# EAGLE board print (EAGLE 5.12), part 1 of 2
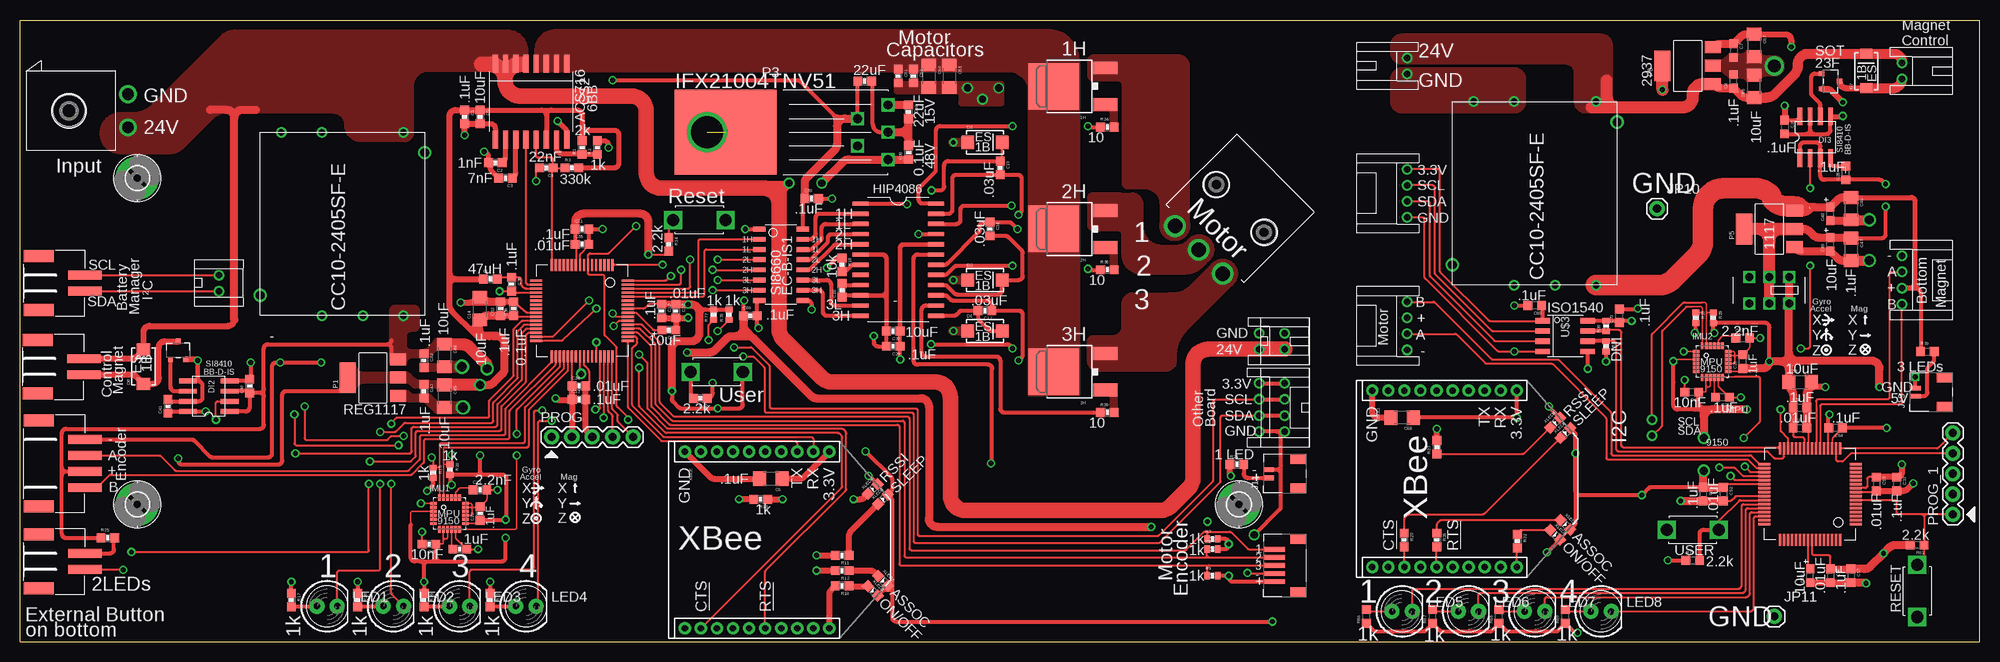
[diagram p0: board, top side]
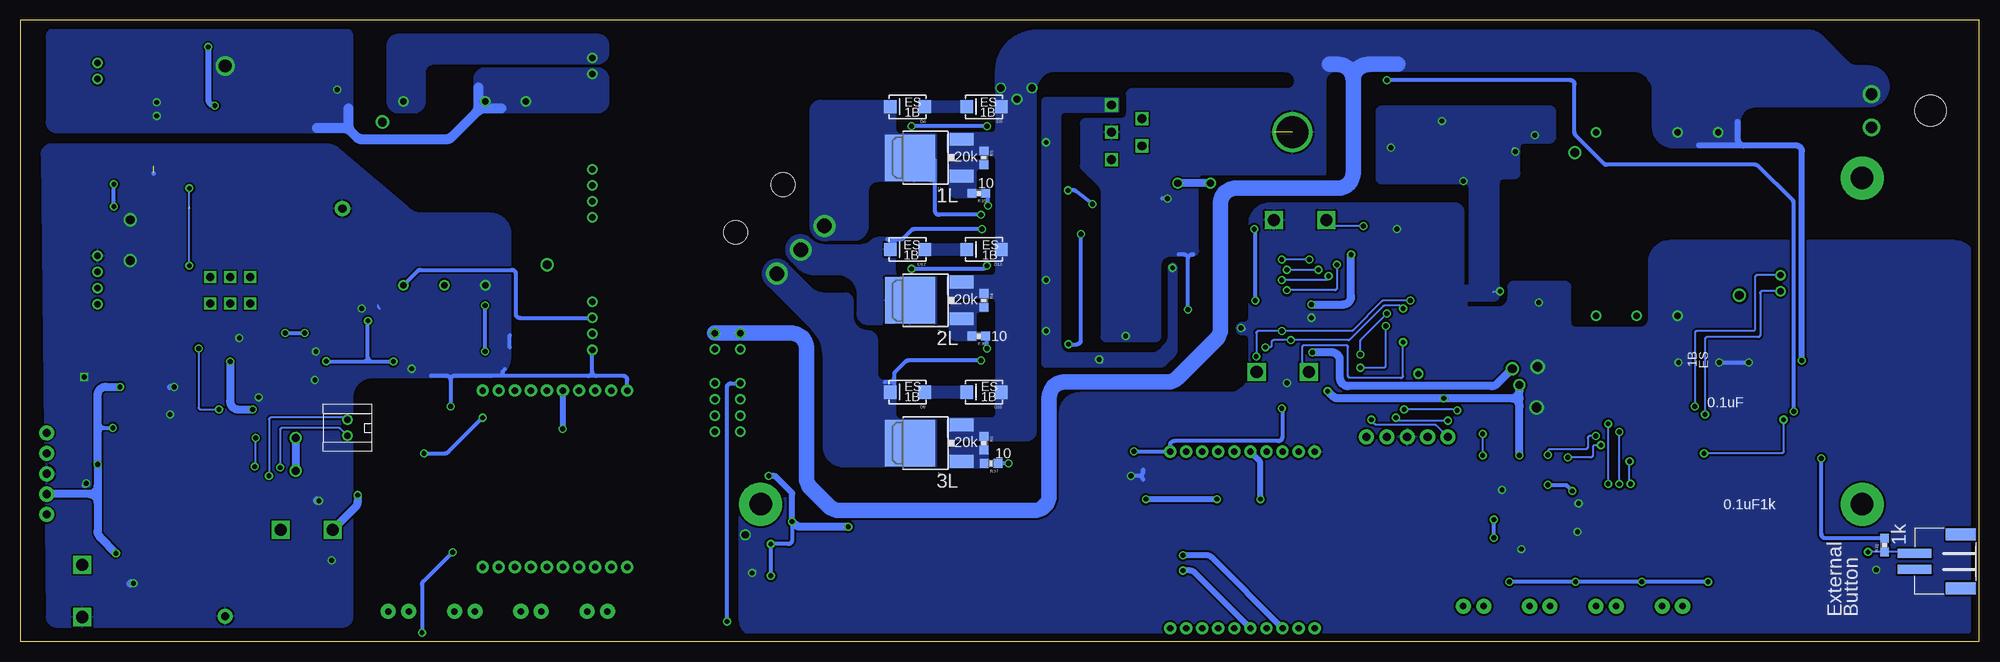
[diagram p1: board, bottom side, seen from below]

Size 243.97 x 77.47 mm. Coordinates in mm from the lower left corner, seen from the top.
Outline: 0,0 243.97,0 243.97,77.47 0,77.47 0,0
Copper layers (1*16): Top 0.035mm / dielectric 1.5mm / Bottom 0.035mm
Design rules "default": minimum track width 10mil, minimum drill 24mil, track to track 8mil, track to pad 8mil, pad to pad 8mil, via to via 8mil, smd to smd 8mil, copper to edge 40mil, drill to drill 8mil, minimum pad ring 10mil, minimum via ring 8mil, stop-mask expansion 4mil, vias tented up to drill 0mil, thermal gap 10mil

## Footprints (pad centres in the part's own frame; a part is rotated, then mirrored left to right if it is on the bottom)
DPAK = smd 5.791 x 6.274: D 0,1.587 | smd 1.6 x 3: G -2.286,-4.851; S 2.286,-4.851
JST-2-PH-SMD = smd 1.1 x 4.2: 1 -1,-7.7; 2 1,-7.7 | smd 1.5 x 3.7: P$1 -3.35,-1.95; P$4 3.35,-1.95
0603 = smd 1.1 x 1.1: 1 -0.85,0; 2 0.85,0
1206 = smd 1.6 x 1.8: 1 -1.4,0; 2 1.4,0
0603-POL = smd 1.1 x 1: + 0.85,0; - -0.85,0
SOIC16-W = smd 0.65 x 2.25: 1 -4.445,-4.75; 2 -3.175,-4.75; 3 -1.905,-4.75; 4 -0.635,-4.75; 5 0.635,-4.75; 6 1.905,-4.75; 7 3.175,-4.75; 8 4.445,-4.75; 9 4.445,4.75; 10 3.175,4.75; 11 1.905,4.75; 12 0.635,4.75; 13 -0.635,4.75; 14 -1.905,4.75; 15 -3.175,4.75; 16 -4.445,4.75
SMA-DIODE = smd 1.52 x 1.63: A -2.15,0; C 2.15,0
SMA-DIODE@1 = smd 1.27 x 1.47: A -2.15,0; C 2.15,0
SOIC16-N = smd 0.6 x 1.55: 1 -4.445,-2.7; 2 -3.175,-2.7; 3 -1.905,-2.7; 4 -0.635,-2.7; 5 0.635,-2.7; 6 1.905,-2.7; 7 3.175,-2.7; 8 4.445,-2.7; 9 4.445,2.7; 10 3.175,2.7; 11 1.905,2.7; 12 0.635,2.7; 13 -0.635,2.7; 14 -1.905,2.7; 15 -3.175,2.7; 16 -4.445,2.7
SOIC8-N = smd 2.2 x 0.6: 1 -2.6,1.905; 2 -2.6,0.635; 3 -2.6,-0.635; 4 -2.6,-1.905; 5 2.6,-1.905; 6 2.6,-0.635; 7 2.6,0.635; 8 2.6,1.905
2,8-PAD = drill 2.8 pad 5.334 round: B2,8 0,0
LGA24_4X4 = smd 0.8 x 0.35: 1 -2,1.25; 2 -2,0.75; 3 -2,0.25; 4 -2,-0.25; 5 -2,-0.75; 6 -2,-1.25; 13 2,-1.25; 14 2,-0.75; 15 2,-0.25; 16 2,0.25; 17 2,0.75; 18 2,1.25 | smd 0.35 x 0.85: 7 -1.25,-1.975; 8 -0.75,-1.975; 9 -0.25,-1.975; 10 0.25,-1.975; 11 0.75,-1.975; 12 1.25,-1.975; 19 1.25,1.975; 20 0.75,1.975; 21 0.25,1.975; 22 -0.25,1.975; 23 -0.75,1.975; 24 -1.25,1.975
JST-2-PH-V = drill 0.8 round: 1 -1,0; 2 1,0
JST-4-PH-SMD = smd 1.1 x 4.2: 1 -3,-7.7; 2 -1,-7.7; 3 1,-7.7; 4 3,-7.7 | smd 1.5 x 3.7: P$1 -5.35,-1.95; P$2 5.35,-1.95
JST-5-SH = smd 0.6 x 2.7: 1 2,4; 2 1,4; 3 0,4; 4 -1,4; 5 -2,4 | smd 1.2 x 2: P$6 -3.3,1; P$7 3.3,1
JST-2-PH-TH = drill 0.8 round: 1 -1,-6.35; 2 1,-6.35
JST-SH-2 = smd 0.6 x 1.35: 1 0.5,4.675; 2 -0.5,4.675 | smd 1.2 x 2: P$6 -1.8,1; P$7 1.8,1
JST-4-PH-TH = drill 0.8 round: 1 -3,-6.35; 2 -1,-6.35; 3 1,-6.35; 4 3,-6.35
1X01_TEST = drill 0.762 round: 1 0,0
TE-MINIMATENLOK-2 = drill 1.48 round: 1 -2.07,12.67; 2 2.07,12.67 | hole 3.91: 0,5.33
MOLEX-3-MINIFITJR-RA = drill 1.803 round: 1 4.191,13.538; 2 0,13.538; 3 -4.191,13.538 | hole 3: -4.204,6.248; 4.204,6.248
JST-4-PH-V = drill 0.8 round: 1 -3,0; 2 -1,0; 3 1,0; 4 3,0
1X01 = drill 1.016 pad 1.88 round: 1 0,0
LED5MM = drill 0.813 pad 1.88 round: A -1.27,0; K 1.27,0
SOT23F = smd 0.6 x 0.65: D 0,1.125; G -0.95,-1.125; S 0.95,-1.125
SOIC24-W = smd 0.533 x 1.981: 1 -6.985,-4.686; 2 -5.715,-4.686; 3 -4.445,-4.686; 4 -3.175,-4.686; 5 -1.905,-4.686; 6 -0.635,-4.686; 7 0.635,-4.686; 8 1.905,-4.686; 9 3.175,-4.686; 10 4.445,-4.686; 11 5.715,-4.686; 12 6.985,-4.686; 13 6.985,4.686; 14 5.715,4.686; 15 4.445,4.686; 16 3.175,4.686; 17 1.905,4.686; 18 0.635,4.686; 19 -0.635,4.686; 20 -1.905,4.686; 21 -3.175,4.686; 22 -4.445,4.686; 23 -5.715,4.686; 24 -6.985,4.686
SOT223 = smd 1.499 x 2.007: 1 -2.261,-3.15; 2 0.025,-3.15; 3 2.311,-3.15 | smd 3.81 x 2.007: 4 0,3.15
CC6-2405SF-E = drill 0.8 round: 1 -11.43,7.62; 2 -11.43,-2.54; 3 -11.43,-7.62; 5 11.43,-2.54; 6 11.43,2.54; 7 11.43,7.62 | drill 1.1 round: P$9 8.89,-10.25; P$10 -8.89,10.25
TO220-5 = drill 1.1 square: 1 3.81,-3.404; 2 0,-1.702; 3 3.81,0; 4 0,1.702; 5 3.81,3.404 | smd 12.7 x 10.541: PAD -16.434,0 | drill 3.937 round: PAD2 -18.72,0
TQFP64_10X10 = smd 1.5 x 0.3: 1 -5.7,3.75; 2 -5.7,3.25; 3 -5.7,2.75; 4 -5.7,2.25; 5 -5.7,1.75; 6 -5.7,1.25; 7 -5.7,0.75; 8 -5.7,0.25; 9 -5.7,-0.25; 10 -5.7,-0.75; 11 -5.7,-1.25; 12 -5.7,-1.75; 13 -5.7,-2.25; 14 -5.7,-2.75; 15 -5.7,-3.25; 16 -5.7,-3.75; 33 5.7,-3.75; 34 5.7,-3.25; 35 5.7,-2.75; 36 5.7,-2.25; 37 5.7,-1.75; 38 5.7,-1.25; 39 5.7,-0.75; 40 5.7,-0.25; 41 5.7,0.25; 42 5.7,0.75; 43 5.7,1.25; 44 5.7,1.75; 45 5.7,2.25; 46 5.7,2.75; 47 5.7,3.25; 48 5.7,3.75 | smd 0.3 x 1.5: 17 -3.75,-5.7; 18 -3.25,-5.7; 19 -2.75,-5.7; 20 -2.25,-5.7; 21 -1.75,-5.7; 22 -1.25,-5.7; 23 -0.75,-5.7; 24 -0.25,-5.7; 25 0.25,-5.7; 26 0.75,-5.7; 27 1.25,-5.7; 28 1.75,-5.7; 29 2.25,-5.7; 30 2.75,-5.7; 31 3.25,-5.7; 32 3.75,-5.7; 49 3.75,5.7; 50 3.25,5.7; 51 2.75,5.7; 52 2.25,5.7; 53 1.75,5.7; 54 1.25,5.7; 55 0.75,5.7; 56 0.25,5.7; 57 -0.25,5.7; 58 -0.75,5.7; 59 -1.25,5.7; 60 -1.75,5.7; 61 -2.25,5.7; 62 -2.75,5.7; 63 -3.25,5.7; 64 -3.75,5.7
1X05 = drill 1.016 pad 1.88 round: 1 0,0; 2 2.54,0; 3 5.08,0; 4 7.62,0; 5 10.16,0
0402 = smd 0.7 x 0.9: 1 -0.65,0; 2 0.65,0
TACTILE_SWITCH = drill 1.5 square: 1 -3.25,0; 2 3.25,0
SLIDE_SWITCH = drill 1 square: 1 -2.489,1.651; 2 0,1.651; 3 2.489,1.651; 4 2.489,-1.651; 5 0,-1.651; 6 -2.489,-1.651
SOIC8 = smd 0.65 x 1.8: 1 -1.905,-2.8; 2 -0.635,-2.8; 3 0.635,-2.8; 4 1.905,-2.8; 5 1.905,2.8; 6 0.635,2.8; 7 -0.635,2.8; 8 -1.905,2.8
XBEE-SILK = drill 0.8 pad 1.524 round: 1 -11,20; 2 -11,18; 3 -11,16; 4 -11,14; 5 -11,12; 6 -11,10; 7 -11,8; 8 -11,6; 9 -11,4; 10 -11,2; 11 11,2; 12 11,4; 13 11,6; 14 11,8; 15 11,10; 16 11,12; 17 11,14; 18 11,16; 19 11,18; 20 11,20
0603-DIODE = smd 1.1 x 1.1: AN -0.85,0; CAT 0.85,0

## Placement (x,y rotation side)
1H  IRLR024  [DPAK]  130.3,69.22 90 top
1L  IRLR024  [DPAK]  131.57,60.33 90 bottom
2H  IRLR024  [DPAK]  130.3,51.44 90 top
2L  IRLR024  [DPAK]  131.57,42.55 90 bottom
3H  IRLR024  [DPAK]  130.3,33.66 90 top
3L  IRLR024  [DPAK]  131.57,24.77 90 bottom
BUTTON  [JST-2-PH-SMD]  0.38,10.03 270 bottom
C1  .1uF  [0603]  55.37,65.41 270 top
C2  1nF  [0603]  59.18,59.69 180 top
C3  7nF  [0603]  60.45,57.78 180 top
C4  22nF  [0603]  65.53,59.05 180 top
C5  10uF  [0603]  57.28,65.41 270 top
C6  .1uF  [1206]  93.47,20.32 180 top
C7  .1uF 24V  [0603]  213.36,73.66 270 top
C8  .1uF 24V  [0603]  213.36,69.85 90 top
C9  22uF  [0603]  105.16,69.85 0 top
C10  22uF 15V  [0603]  110.62,66.04 270 top
C11  .1uF  [0603]  69.98,51.44 0 top
C12  .1uF  [0603]  79.88,41.22 270 top
C13  .1uF  [0603]  69.6,30.23 0 top
C14  10uF  [1206]  57.28,41.53 90 top
C15  10uF  [0603-POL]  80.77,38.86 180 top
C16  DNI  [0603]  102.36,43.81 90 top
C17  .03uF 15V  [0603]  120.14,41.27 180 top
C18  .03uF 15V  [0603]  120.78,51.44 270 top
C19  .03uF 15V  [0603]  122.05,59.05 270 top
C20  10nF  [0603]  50.93,12.19 180 top
C21  .1uF  [0603]  54.74,11.56 180 top
C22  .1uF  [0603]  57.28,16 90 top
C23  2.2nF  [0603]  57.28,18.92 0 top
C24  10nF  [0603]  208.15,31.11 180 top
C25  .1uF  [0603]  211.96,30.48 180 top
C26  .1uF  [0603]  214.5,34.92 90 top
C27  2.2nF  [0603]  214.5,37.85 0 top
C28  .1uF  [0603]  227.33,58.42 90 top
C29  .1uF  [0603]  108.71,36.83 180 top
C30  10uF  [0603]  108.71,38.73 180 top
C31  .1uF  [0603]  219.71,64.14 270 top
C32  .1uF  [0603]  233.68,19.68 270 top
C33  .1uF  [0603]  59.82,41.53 90 top
C34  .01uF  [0603]  69.6,31.88 0 top
C35  .01uF  [0603]  69.98,49.53 0 top
C36  .01uF  [0603]  61.47,41.53 90 top
C37  .01uF  [0603]  81.66,41.22 270 top
C38  .1uF  [0603]  61.21,44.58 270 top
C39  .1uF 48V  [0603]  110.62,60.96 90 top
C40  .1uF  [0603]  28.57,31.88 90 top
C41  .1uF  [0603]  18.41,29.34 90 top
C42  .1uF  [0603]  50.29,35.05 270 top
C43  .1uF  [0603]  50.29,31.24 270 top
C44  10uF  [1206]  52.83,35.69 270 top
C45  10uF  [1206]  52.83,30.61 270 top
C46  .1uF  [1206]  227.97,53.98 270 top
C47  .1uF  [1206]  227.97,48.9 270 top
C48  10uF  [0603-POL]  225.43,53.34 90 top
C49  10uF  [0603-POL]  225.43,49.53 90 top
C50  .01uF  [0603]  225.43,8.26 270 top
C51  .01uF  [0603]  221.62,26.67 0 top
C52  .01uF  [0603]  212.09,18.41 270 top
C53  .01uF  [0603]  231.14,19.68 270 top
C54  .1uF  [0603]  226.06,26.67 180 top
C55  .1uF  [0603]  209.55,18.41 270 top
C56  .1uF  [0603]  221.62,29.21 0 top
C57  .1uF  [0603]  227.97,8.26 270 top
C58  10uF  [1206]  221.62,32.38 0 top
C59  .1uF  [0603]  98.55,55.24 0 top
C60  .1uF  [0603]  90.93,40.64 0 top
C61  .01uF  [0603]  109.35,70.48 270 top
C62  .1uF  [0603]  111.25,70.48 270 top
C63  10uF  [0603-POL]  222.88,8.26 90 top
C64  1uF  [1206]  113.16,70.48 270 top
C65  10uF  [1206]  115.7,70.48 270 top
C66  10uF 24V  [1206]  215.9,69.22 90 top
C67  10uF 24V  [1206]  215.9,74.3 270 top
C68  .1uF  [1206]  172.09,27.94 180 top
C69  .1uF  [0603]  188.59,41.91 180 top
C70  .1uF  [0603]  199.14,40.64 90 top
CS2  ACS716KLATR-6BB-T  [SOIC16-W]  63.63,67.31 180 top
D1  ES1B  [SMA-DIODE]  120.14,38.73 0 top
D2  ES1B  [SMA-DIODE]  120.14,45.09 0 top
D3  ES1B  [SMA-DIODE]  120.14,62.23 0 top
D4  ES1B  [SMA-DIODE]  133.48,66.67 180 bottom
D5  ES1B  [SMA-DIODE]  123.95,66.67 180 bottom
D7  ES1B  [SMA-DIODE@1]  229.87,71.12 90 top
D8  ES1B  [SMA-DIODE]  15.37,34.29 90 top
D9  ES1B  [SMA-DIODE]  133.48,31.11 180 bottom
D10  ES1B  [SMA-DIODE]  123.95,31.11 180 bottom
D11  ES1B  [SMA-DIODE]  123.95,48.9 180 bottom
D12  ES1B  [SMA-DIODE]  133.48,48.9 180 bottom
DI1  DIGITAL-ISOLATOR-6CH  [SOIC16-N]  94.74,46.99 270 top
DI2  DIGITAL-ISOLATOR-1CHSOIC8-N  [SOIC8-N]  23.5,30.61 180 top
DI3  DIGITAL-ISOLATOR-1CHSOIC8-N  [SOIC8-N]  223.52,62.87 90 top
H1  MOUNT-PAD-ROUND2.8  [2,8-PAD]  14.61,57.78 0 top
H2  MOUNT-PAD-ROUND2.8  [2,8-PAD]  14.61,17.14 0 top
H3  MOUNT-PAD-ROUND2.8  [2,8-PAD]  151.76,17.14 0 top
IMU1  MPU-9150  [LGA24_4X4]  53.47,16 0 top
IMU2  MPU-9150  [LGA24_4X4]  210.69,34.92 0 top
J1  [JST-2-PH-V]  203.2,26.67 270 bottom
J2  [JST-4-PH-SMD]  0.38,22.23 90 top
J3  [JST-2-PH-SMD]  0.38,44.7 90 top
J5  [JST-5-SH]  160.15,9.53 90 top
J7  [JST-2-PH-TH]  160.66,37.47 270 top
J10  [JST-2-PH-SMD]  0.38,10.03 90 top
J11  [JST-SH-2]  160.15,20.95 90 top
J14  [JST-2-PH-SMD]  0.25,34.29 90 top
J17  [JST-4-PH-TH]  240.66,45.09 270 top
J18  [JST-4-PH-TH]  166.37,39.37 90 top
J19  [JST-SH-2]  240.66,31.11 90 top
J21  [JST-2-PH-TH]  240.66,71.12 270 top
JP1  M01TEST  [1X01_TEST]  69.85,33.4 0 top
JP2  [TE-MINIMATENLOK-2]  0.76,66.17 270 top
JP3  [JST-2-PH-V]  157.48,37.47 90 top
JP4  [JST-2-PH-TH]  166.37,71.75 90 top
JP5  [JST-2-PH-V]  24.77,44.7 90 top
JP6  [MOLEX-3-MINIFITJR-RA]  156.34,58.42 135 top
JP7  [JST-4-PH-TH]  160.66,29.21 270 top
JP8  [JST-4-PH-V]  157.48,29.21 270 top
JP9  [JST-4-PH-TH]  166.37,55.88 90 top
JP10  M01PTH  [1X01]  203.84,53.98 0 top
JP11  M01PTH  [1X01]  218.44,3.17 0 top
L1  47uH  [0603]  58.55,45.21 0 top
LED1  [LED5MM]  38.23,4.45 0 top
LED2  [LED5MM]  46.48,4.45 0 top
LED3  [LED5MM]  54.74,4.45 0 top
LED4  [LED5MM]  62.99,4.45 0 top
LED5  [LED5MM]  172.09,3.81 0 top
LED6  [LED5MM]  180.34,3.81 0 top
LED7  [LED5MM]  188.59,3.81 0 top
LED8  [LED5MM]  196.85,3.81 0 top
M1  N-MOSSOT23F  [SOT23F]  19.68,36.32 0 top
M2  N-MOSSOT23F  [SOT23F]  225.43,69.85 270 top
MD1  HIP4086  [SOIC24-W]  109.35,47.62 270 top
P1  LINEAR-REGREG1117  [SOT223]  43.94,32.89 90 top
P2  CC10-2405SF-E  [CC6-2405SF-E]  40.13,52.07 270 top
P3  IFX21004TNV51  [TO220-5]  104.27,63.5 0 top
P4  CC10-2405SF-E  [CC6-2405SF-E]  188.59,55.88 270 top
P5  LINEAR-REGREG1117  [SOT223]  217.81,51.44 90 top
P6  LINEAR-REGLM2937  [SOT223]  207.65,71.75 90 top
PIC1  DSPIC33EP512MC806  [TQFP64_10X10]  69.98,41.27 270 top
PIC2  DSPIC33EP512MC806  [TQFP64_10X10]  222.88,18.41 180 top
PROG  [1X05]  66.17,25.53 0 top
PROG_1  [1X05]  240.66,15.88 90 top
R1  2k  [0603]  69.98,61.59 90 top
R2  1k  [0603]  71.88,61.59 90 top
R3  330k  [0603]  68.71,59.05 0 top
R4  20k  [0603]  123.95,42.55 270 bottom
R5  20k  [0603]  123.95,60.33 270 bottom
R6  20k  [0603]  123.95,24.77 270 bottom
R7  1k  [0402]  148.46,12.83 0 top
R8  1k  [0402]  148.46,11.56 0 top
R9  1k  [0402]  148.46,8.26 0 top
R10  1k  [0603]  102.36,6.99 180 top
R11  1k  [0603]  102.36,10.79 180 top
R12  1k  [0603]  102.36,8.89 180 top
R13  1k  [0603]  92.2,17.78 180 top
R14  2.2k  [0603]  80.77,49.53 270 top
R15  [0402]  51.44,21.08 270 top
R16  10k  [0603]  102.36,46.99 270 top
R17  1k  [0603]  33.78,5.21 270 top
R18  1k  [0603]  42.04,5.21 270 top
R19  1k  [0603]  50.29,5.21 270 top
R20  [0402]  53.53,21.46 270 top
R21  [0603]  11.81,12.06 90 bottom
R22  1k  [0603]  186.44,12.57 270 top
R23  1k  [0603]  172.34,12.7 270 top
R24  47  [0603]  151.51,22.1 0 top
R25  22  [0603]  10.92,12.95 0 top
R26  1k  [0603]  176.4,12.7 270 top
R27  1k  [0603]  176.4,24.26 90 top
R28  [0402]  208.66,40.39 270 top
R29  [0402]  210.82,40.39 270 top
R30  [0402]  197.49,39.37 90 top
R31  1k  [0603]  58.55,5.21 270 top
R32  [0402]  197.49,36.83 270 top
R34  10ohm  [0603]  135.38,64.14 0 top
R35  10ohm  [0603]  124.59,55.88 180 bottom
R36  10ohm  [0603]  124.59,38.1 180 bottom
R37  10ohm  [0603]  123.06,22.23 180 bottom
R38  10ohm  [0603]  135.38,46.35 0 top
R39  10ohm  [0603]  135.38,28.57 0 top
R42  2.2k  [0603]  84.71,30.35 180 top
R61  2.2k  [0603]  236.22,12.06 180 top
R66  1k  [0603]  167.64,3.17 90 top
R67  1k  [0603]  175.9,3.17 90 top
R68  1k  [0603]  184.15,3.17 90 top
R69  1k  [0603]  192.41,3.17 90 top
R70  3.3  [0603]  237.49,36.2 0 top
R73  2.2k  [0603]  208.28,10.16 0 top
R77  1k  [0402]  86.36,40.77 90 top
R78  1k  [0402]  88.27,40.77 90 top
RESET1  TACTILE_SWITCH  [TACTILE_SWITCH]  84.58,52.58 0 top
RESET2  TACTILE_SWITCH  [TACTILE_SWITCH]  236.22,6.35 270 top
SW1  SLIDE_SWTHROUGHHOLE  [SLIDE_SWITCH]  217.81,43.81 180 top
U$3  ISO1540  [SOIC8]  192.41,38.1 270 top
USER  TACTILE_SWITCH  [TACTILE_SWITCH]  208.28,13.97 0 top
USER1  TACTILE_SWITCH  [TACTILE_SWITCH]  86.74,33.66 180 top
XBEE  XBEETH  [XBEE-SILK]  80.77,12.7 270 top
XBEE1  XBEETH  [XBEE-SILK]  166.37,20.32 270 top
XLED1  [0603-DIODE]  106.17,6.35 315 top
XLED2  [0603-DIODE]  107.44,17.78 45 top
XLED3  [0603-DIODE]  107.44,7.62 315 top
XLED4  [0603-DIODE]  106.17,19.05 45 top
XLED5  [0603-DIODE]  191.13,13.34 315 top
XLED6  [0603-DIODE]  192.41,26.04 45 top
XLED7  [0603-DIODE]  192.41,14.61 315 top
XLED8  [0603-DIODE]  191.13,27.3 45 top

## Library data of the parts
1H 1L 2H 2L 3H 3L BUTTON C1-C6 C9-C23 C29 C30 C33-C45 C59-C62 C64 C65 C68 CS2 D1-D5 D8-D12 DI1 DI2 H1-H3 IMU1 J1-J3 J5 J7 J10 J11 J14 J18 JP1-JP11 L1 LED1-LED8 M1 MD1 P1-P4 PIC1 PROG R1-R32 R34-R39 R42 R77 R78 RESET1 U$3 USER1 XBEE XBEE1 XLED1-XLED8 = GibbotV5
C7 C8 C24-C28 C31 C32 C46-C58 C63 C66 C67 C69 C70 D7 DI3 IMU2 J17 J19 J21 M2 P5 P6 PIC2 PROG_1 R61 R66-R70 R73 RESET2 USER = Gibbot v4
SW1 = Gibbot

## Nets
1HO: 1H.G R34.2
1HS: 1H.S 1L.D C19.2 D4.C JP6.1 MD1.23
1LO: 1L.G R5.2 R35.2
2HO: 2H.G R38.2
2HS: 2H.S 2L.D C18.1 D12.C JP6.2 MD1.18
2LO: 2L.G R4.2 R36.2
3.3V: C1.1 C5.1 C6.1 C11.1 C12.1 C13.1 C14.1 C20.1 C22.1 C33.1 C34.1 C35.1 C36.1 C37.1 C43.1 C45.1 CS2.14 IMU1.3 IMU1.8 IMU1.9 IMU1.13 JP7.1 JP8.1 L1.1 P1.2 P1.4 PIC1.10 PIC1.26 PIC1.38 PIC1.57 PROG.2 R1.2 R3.2 R14.2 R15.2 R17.1 R18.1 R19.1 R20.2 R21.2 R31.1 R77.2 R78.2 USER1.1 XBEE.1 XLED1.CAT XLED2.CAT XLED3.CAT
3.3V1: C24.1 C26.1 C32.1 C50.1 C51.1 C52.1 C53.1 C54.1 C55.1 C56.1 C57.1 C58.1 C68.1 C70.1 IMU2.3 IMU2.8 IMU2.9 IMU2.13 PIC2.10 PIC2.19 PIC2.26 PIC2.38 PIC2.57 PROG_1.2 R28.2 R29.2 R30.2 R32.2 R61.2 R66.1 R67.1 R68.1 R69.1 SW1.1 SW1.6 U$3.8 USER.1 XBEE1.1 XLED5.CAT XLED6.CAT XLED7.CAT
3HO: 3H.G R39.2
3HS1: 3H.S 3L.D C17.1 D9.C JP6.3 MD1.15
3LO: 3L.G R6.2 R37.2
5V1: C9.1 C41.1 C59.1 DI1.16 DI2.8 P3.4
5V2: C40.1 C42.1 C44.1 C60.1 DI1.1 DI2.1 DI2.3 J2.2 J5.5 P1.3 P2.7 R7.2 R8.2 R9.2 R24.1 R25.1
5V3: C46.1 C48.+ J17.3 J18.3 P4.7 P5.3 R70.1
15V: C10.1 C29.1 C30.1 D1.A D2.A D3.A MD1.20 P3.5 R16.1
24V: C39.1 CS2.5 CS2.6 CS2.7 CS2.8 D8.C J7.2 J14.2 JP2.2 JP3.1 P2.1 P3.1
24V1: C8.1 C66.1 D7.C J21.1 JP4.2 P4.1 P6.1
AHB: C18.2 D2.C MD1.16
AHO: MD1.17 R38.1
ALO: MD1.21 R36.1
BHB: C19.1 D3.C MD1.1
BHO: MD1.24 R34.1
BLO: MD1.22 R35.1
BUTTON: BUTTON.1 PIC1.30 R21.1
CHB: C17.2 D1.C MD1.13
CHO: MD1.14 R39.1
CLO: MD1.19 R37.1
CTS: PIC1.54 XBEE.12
CTS1: XBEE1.12
FAULT: C4.1 CS2.13 PIC1.16 R3.1
GND: BUTTON.2
GND1: 1L.S 2L.S 3L.S C9.2 C10.2 C16.1 C29.2 C30.2 C39.2 C41.2 C59.2 C61.2 C62.2 C64.2 C65.2 D5.A D10.A D11.A DI1.9 DI2.5 DI2.7 J7.1 JP2.1 JP3.2 M1.S MD1.6 MD1.10 P2.2 P2.3 P3.3 P3.PAD P3.PAD2 R4.1 R5.1 R6.1
GND2: C1.2 C2.2 C3.2 C4.2 C5.2 C6.2 C11.2 C12.2 C13.2 C14.2 C15.- C20.2 C21.1 C22.2 C23.2 C33.2 C34.2 C35.2 C36.2 C37.2 C38.2 C40.2 C42.2 C43.2 C44.2 C45.2 C60.2 CS2.9 CS2.16 DI1.8 DI2.4 IMU1.1 IMU1.11 IMU1.15 IMU1.17 IMU1.18 J2.4 J5.4 J10.1 J11.1 JP7.4 JP8.4 P1.1 P2.5 PIC1.9 PIC1.20 PIC1.25 PIC1.41 PROG.3 R2.2 R42.1 RESET1.2 XBEE.10 XLED4.CAT
GND3: C7.2 C8.2 C31.2 C66.2 C67.2 DI3.5 DI3.7 JP4.1 M2.S P4.2 P4.3 P6.2 P6.4
GND4: C24.2 C25.1 C26.2 C27.2 C28.2 C32.2 C46.2 C47.2 C48.- C49.- C50.2 C51.2 C52.2 C53.2 C54.2 C55.2 C56.2 C57.2 C58.2 C63.- C68.2 C70.2 DI3.4 IMU2.1 IMU2.11 IMU2.15 IMU2.17 IMU2.18 J17.1 J18.1 J19.1 JP10.1 JP11.1 P4.5 P5.1 PIC2.9 PIC2.20 PIC2.25 PIC2.41 PROG_1.3 R73.1 RESET2.2 U$3.5 XBEE1.10 XLED8.CAT
HALL1: J5.1 PIC1.53 R7.1
HALL2: J5.2 PIC1.52 R8.1
HALL3: J5.3 PIC1.51 R9.1
I_SENSE: CS2.12 PIC1.18
IMU_INT1: IMU1.12 PIC1.35
IMU_INT2: IMU2.12 PIC2.35
LED1: LED1.K PIC1.28
LED2: LED2.K PIC1.27
LED3: LED3.K PIC1.45
LED4: LED4.K PIC1.46
LED5: LED5.K PIC2.43
LED6: LED6.K PIC2.44
LED7: LED7.K PIC2.45
LED8: LED8.K PIC2.46
LOW_MAG: DI3.2 PIC2.30
LOW_MAG_2: DI3.6 M2.G
LOW_MAGA: J17.2 PIC2.23
LOW_MAGB: J17.4 PIC2.22
MCLR1: PIC1.7 PROG.1 R14.1 RESET1.1
MCLR_2: PIC2.7 PROG_1.1 R61.1 RESET2.1
MOTA: J18.2 PIC2.34
MOTB: J18.4 PIC2.33
MOTOR+: 1H.D 2H.D 3H.D C61.1 C62.1 C64.1 C65.1 CS2.1 CS2.2 CS2.3 CS2.4
N$1: R22.2 XBEE1.20
N$2: MD1.7 R16.2
N$3: C16.2 MD1.9
N$4: R11.2 XBEE.13
N$5: CS2.15 R1.1 R2.1
N$6: JP1.1 PIC1.40
N$7: C2.1 CS2.10
N$8: C3.1 CS2.11
N$9: R10.2 XBEE.20
N$10: R10.1 XLED1.AN
N$11: LED1.A R17.2
N$12: LED2.A R18.2
N$13: LED3.A R19.2
N$14: R22.1 XLED5.AN
N$15: C38.1 L1.2 PIC1.19
N$16: C15.+ PIC1.56
N$17: LED4.A R31.2
N$18: J11.2 R24.2
N$19: J10.2 R25.2
N$20: D8.A J14.1 M1.D
N$21: R23.2 XBEE1.13
N$22: C27.1 IMU2.20
N$23: R23.1 XLED6.AN
N$24: C21.2 IMU1.10
N$25: C23.1 IMU1.20
N$26: R26.2 XBEE1.15
N$27: R11.1 XLED2.AN
N$28: R26.1 XLED7.AN
N$29: R27.2 XBEE1.6
N$30: R12.2 XBEE.15
N$31: R12.1 XLED3.AN
N$32: R13.2 XBEE.6
N$33: R27.1 XLED8.AN
N$34: C25.2 IMU2.10
N$35: JP9.2 U$3.3
N$36: JP9.3 U$3.2
N$37: C69.1 JP9.4 U$3.1
N$38: D7.A J21.2 M2.D
N$39: R13.1 XLED4.AN
N$40: C7.1 C31.1 C67.1 DI3.8 P6.3
N$50: C69.2 JP9.1 U$3.4
N$60: D4.A D5.C
N$61: D9.A D10.C
N$62: D11.C D12.A
N$104: C63.+ PIC2.56
N$108: LED5.A R66.2
N$109: LED6.A R67.2
N$110: LED7.A R68.2
N$111: LED8.A R69.2
N$112: J19.2 R70.2
PGEC1_2: PIC2.17 PROG_1.5
PGEC2: PIC1.48 PROG.5
PGED1_2: PIC2.18 PROG_1.4
PGED2: PIC1.47 PROG.4
PRE3.3: C28.1 C47.1 C49.+ DI3.1 DI3.3 P5.2 P5.4 SW1.2 SW1.5
PWM1H: DI1.2 PIC1.61
PWM1HO: DI1.15 MD1.2
PWM1L: DI1.3 PIC1.60
PWM1LO: DI1.14 MD1.3
PWM2H: DI1.5 PIC1.63
PWM2HO: DI1.12 MD1.5
PWM2L: DI1.4 PIC1.62
PWM2LO: DI1.13 MD1.4
PWM3H: DI1.7 PIC1.1
PWM3HO: DI1.10 MD1.12
PWM3L: DI1.6 PIC1.64
PWM3LO: DI1.11 MD1.11
RTS: PIC1.55 XBEE.16
RTS1: XBEE1.16
RX: PIC1.50 XBEE.2
RX1: XBEE1.2
SCL1: IMU1.23 J3.2 JP5.2 PIC1.37 R20.1
SCL2: JP7.2 JP8.2 PIC1.32 R77.1
SCL3: IMU2.23 J1.1 PIC2.37 R29.1
SCL4: PIC2.31 R32.1 U$3.6
SDA1: IMU1.24 J3.1 JP5.1 PIC1.36 R15.1
SDA2: JP7.3 JP8.3 PIC1.31 R78.1
SDA3: IMU2.24 J1.2 PIC2.36 R28.1
SDA4: PIC2.32 R30.1 U$3.7
TOP_MAGO: DI2.6 M1.G
TOPMAGA: J2.3 PIC1.33
TOPMAGB: J2.1 PIC1.34
TOPMAGCON: DI2.2 PIC1.29
TX: PIC1.49 XBEE.3
TX1: XBEE1.3
USER: PIC1.44 R42.2 USER1.2
USER1: PIC2.42 R73.2 USER.2

## Tracks (layer width: path | path; a pad name or v marks a point on that pad's centre or on a via)
1HO
  pour Top (no thermals): 134.11,67.31 136.27,67.31 arc-90 136.53,67.06 136.53,63.75 135.81,63.75 135.81,66 arc90 135.56,66.26 134.11,66.26
1HS  (via drill 0.6)
  Top 0.508: MD1.23 115.57,53.34 arc90 116.08,53.85 116.08,57.7 arc-90 116.59,58.2 C19.2 124.21,58.2 arc-90 124.71,57.7 124.71,53.8 arc-45 124.56,53.45 v124.33,53.21
  Bottom 0.508: v124.33,53.21 129.54,53.21 arc90 130.05,53.72 130.05,59.82 arc-90 130.56,60.33 1L.D | 130.05,57.02 arc-90 130.56,57.53 132.72,57.53
  pour Top (no thermals): 141.99,51.82 145.54,51.82 145.54,71.75 arc90 144.27,73.03 141.99,73.03
  pour Top (no thermals): 143.76,53.59 arc-90 145.54,51.82 arc-90 143.76,50.04 arc-90 141.99,51.82 arc-90
  pour Top (no thermals): 132.97,72.39 132.97,70.61 arc90 133.6,69.98 136.65,69.98 arc-90 137.29,69.34 137.29,57.15 arc90 137.92,56.52 140.08,56.52 arc-90 141.99,54.61 142.37,54.61 142.37,69.98 arc90 143,70.61 143,73.03 133.6,73.03 arc90
  pour Bottom (no thermals): 129.92,63.25 129.92,57.4 143,57.4 143,67.44 135,67.44 135,63.88 arc-90 134.37,63.25
  pour Bottom (no thermals): 138.43,51.82 arc90 140.21,50.04 143.76,50.04 143.76,51.82
  pour Bottom (no thermals): 138.43,51.82 145.54,51.82 145.54,66.17 arc90 144.27,67.44 137.41,67.44 137.16,57.4 arc-90 138.43,56.13
  pour Bottom (no thermals): 143.76,53.59 arc-90 145.54,51.82 arc-90 143.76,50.04 arc-90 141.99,51.82 arc-90
1LO
  pour Bottom (no thermals): 123.47,59.94 127.41,59.94 arc-90 128.22,59.16 128.22,56.21 arc-90 127.41,55.4 124.97,55.4 124.97,58.5 arc90 124.46,59 123.47,59
2HO
  pour Top (no thermals): 134.11,49.53 136.27,49.53 arc-90 136.53,49.28 136.53,45.97 135.81,45.97 135.81,48.22 arc90 135.56,48.48 134.11,48.48
2HS  (via drill 0.6)
  Top 0.508: v124.21,51.44 123.5,52.14 arc45 123.15,52.28 C18.1 120.02,52.28 arc90 119.51,51.78 119.51,51.39 arc-45 119.36,51.03 115.47,47.14 arc-45 115.11,46.99 MD1.18
  Bottom 0.508: v124.21,51.44 132.63,51.44 arc-45 132.99,51.29 133.96,50.31 arc45 134.32,50.16 136.02,50.16 arc90 135.63,49.77 D12.C | 134.62,50.16 arc-90 135.13,49.66 135.13,48.9
  pour Top (no thermals): 132.97,55.24 132.97,51.94 arc90 133.6,51.31 137.29,51.31 137.03,55.88 133.6,55.88 arc90
  pour Top (no thermals): 135.76,55.88 138.43,55.88 arc-90 139.7,54.61 139.7,51.82 arc90 142.11,49.4 142.11,45.85 139.7,45.85 arc-90 137.29,48.26 137.29,50.67 arc90 136.65,51.31 135.76,51.31
  pour Bottom (no thermals): 129.92,45.47 129.92,39.62 134.37,45.47
  pour Bottom (no thermals): 136.65,50.29 137.06,50.29 arc-45
  pour Bottom (no thermals): 146.81,50.67 arc-90 148.59,48.9 arc-90 146.81,47.12 arc-90 145.03,48.9 arc-90
  pour Top (no thermals): 146.81,50.67 arc-90 148.59,48.9 arc-90 146.81,47.12 arc-90 145.03,48.9 arc-90
  pour Bottom: 142.75,49.4 144.28,49.4 arc45 145.18,49.77 145.54,50.14 148.06,47.62 147.29,46.85 arc-45 145.12,45.85 142.75,45.85
  pour Top: 142.11,49.4 144.28,49.4 arc45 145.18,49.77 145.54,50.14 148.06,47.62 147.29,46.85 arc-45 145.12,45.85 142.11,45.85
  pour Bottom: 129.92,45.47 134.37,45.47 arc90 135,46.1 135,50.29 136.53,50.29 137.13,50.29 arc-45 138.05,49.91 arc45 139.28,49.4 140.08,49.4 143.76,49.4 arc45 145.54,50.14 148.06,47.62 147.02,46.59 arc-45 145.23,45.85 143,45.85 142.24,45.85 arc90 139.7,43.31 139.7,41.91 139.7,40.89 arc-90 138.43,39.62 129.92,39.62
2LO
  pour Bottom (no thermals): 123.47,42.16 127.41,42.16 arc-90 128.22,41.38 128.22,38.43 arc-90 127.41,37.62 124.97,37.62 124.97,40.72 arc90 124.46,41.22 123.47,41.22
3.3V  (via drill 0.6, 1)
  Top 0.203: IMU1.13 56.79,14.75 arc45 56.94,14.81 C22.1 | IMU1.9 53.22,13.03 arc-90 53.01,12.83 52.91,12.83 | 52.91,12.83 arc90 52.7,12.62 | 52.7,13.03 52.7,12.39 arc-90 52.5,12.19 C20.1 | 52.7,13.03 arc90 52.91,12.83 | IMU1.8 arc90 52.7,14.02 52.7,13.03 | 48.64,14.61 48.64,16.05 arc-90 48.84,16.25 IMU1.3
  Top 0.254: PIC1.10 69.23,49.33 arc45 69.15,49.5 C35.1 | PIC1.57 77.61,41.52 arc45 77.79,41.6 78.19,42 arc-45 78.37,42.07 C12.1 | PIC1.38 68.73,31.92 arc45 C34.1 | PIC1.26 61.98,40.52 arc-45 61.8,40.6 C36.1 | R14.2 80.43,48.33 arc-45 80.25,48.26 v78.23,48.26 | 56.77,40.01 57.15,40.01 C14.1 | 57.28,38.86 57.02,38.61 | 59.05,38.1 58.93,37.97
  Top 0.508: C11.1 C35.1 | XLED1.CAT XLED3.CAT | v53.72,19.56 arc90 53.53,19.88 R20.2 57.78,20.81 | 60.07,15.15 arc90 60.58,15.66 | 60.07,15.15 C22.1 | 39.55,31.24 arc90 40.06,31.75 40.06,33.1 | R15.2 51.44,19.77 arc-45 51.29,19.41 v50.67,18.8 | v105.28,23.75 108.44,20.6 arc-45 108.58,20.24 108.58,19.13 arc-45 108.44,18.77 XLED2.CAT 108.44,17.99 arc-45 108.58,17.63 108.58,7.77 | v19.68,22.86 19.68,22.61 arc90 20.19,22.1 32.13,22.1 arc90 32.64,22.61 32.64,30.73 arc-90 33.15,31.24 41.02,31.24 | USER1.1 89.99,29.59 arc-90 89.48,29.08 v86.87,29.08 82.38,29.08 arc-45 82.02,29.23 81.3,29.95 arc-45 81.15,30.31 v81.15,31.24 | v60.45,12.95 60.45,10.54 arc-90 59.94,10.03 52.28,10.03 | 52.28,10.03 arc-90 51.78,10.54 | 48.64,14.61 48.64,10.54 arc90 49.15,10.03 49.78,10.03 | 51.78,10.54 arc-90 51.27,10.03 | 51.78,10.54 C20.1 | 49.78,10.03 50.8,10.03 | 50.29,9.53 arc90 49.78,10.03 | 50.29,9.53 v50.29,7.49 R19.1 | 50.29,9.53 arc-90 50.8,10.03 | 50.8,10.03 52.28,10.03 | v60.45,15.24 arc-90 60.36,15.15 | 60.36,15.15 60.07,15.15 | 60.36,15.15 60.58,15.15 60.58,20.3 arc90 60.07,20.81 57.78,20.81 | R78.2 R77.2 85.34,41.42 | 84.81,41.27 arc90 84.58,41.04 84.58,41.02 | 84.4,41.96 84.8,41.57 arc45 85.16,41.42 85.34,41.42 | 85.34,41.42 arc90 84.84,40.91 arc90 84.58,40.66 84.58,40.64 | v58.55,7.49 R31.1 | v42.04,7.49 R18.1 | R17.1 v33.78,7.49 | 57.78,20.81 arc-90 57.28,21.32 | 57.28,21.32 v57.28,23.24 | 57.28,21.32 arc-90 56.77,20.81 | 108.58,7.77 108.58,3.05 arc90 109.09,2.54 v155.96,2.54 | XLED1.CAT 107.35,6.33 arc-45 107.71,6.48 108.46,6.48 | XLED1.CAT 108.44,7.41 arc45 108.58,7.77 | JP7.1 JP8.1 | 58.42,38.1 58.42,38.23
  Top 0.61: 64.92,66.25 66.14,66.25 | 64.92,66.25 arc-90 65.53,65.64 | C5.1 64.92,66.25 | 65.53,65.64 CS2.14 | 66.14,66.25 arc90 65.53,65.64 | R3.2 73.94,59.05 arc90 74.55,59.66 74.55,63.14 arc90 73.94,63.75 70.59,63.75 | 69.98,64.36 R1.2 69.98,63.14 arc-90 70.59,63.75 | 66.14,66.25 69.37,66.25 arc-90 69.98,65.64 69.98,64.36 | 69.98,64.36 arc90 70.59,63.75
  Top 0.762: C6.1 97.08,20.32 arc45 97.61,20.54 XBEE.1 | C33.1 C36.1 | 53.47,44.45 53.47,45.97 | 53.47,44.45 arc-90 54.23,45.21 | 54.23,45.21 L1.1 | 53.47,45.97 arc90 54.23,45.21 | 53.47,45.97 53.47,65.49 arc-90 54.23,66.25 C1.1 C5.1 | C34.1 C13.1 arc45 68.71,30.13 | 68.71,30.13 PROG.2 | C37.1 C12.1 | 68.71,30.13 67.21,30.13 arc-45 v66.67,30.35 | 57.28,38.99 arc90 58.04,38.23 58.42,38.23 | 57.28,38.99 C14.1 | 57.28,38.99 57.28,38.86 | 53.47,44.45 53.47,41.95 arc45 53.77,41.23 56.73,38.27 arc45 57.44,37.97 58.93,37.97 | 56.77,38.99 56.77,38.86 arc90 57.02,38.61 | 56.77,40.01 56.77,39.62 arc-90 56.13,38.99
  Top 1.016: C33.1 58.25,40.68 arc45 57.53,40.38 C14.1 | v81.15,31.24 81.15,36.58 arc-90 82.04,37.47 83.57,37.47 arc90 84.58,38.48 84.58,40.64 84.58,41.02 arc90 83.57,42.04 v83.19,42.04 81.66,42.04 C37.1 | v78.23,48.26 78.23,52.32 arc90 77.22,53.34 70.14,53.34 arc90 69.13,52.32 C11.1 | v57.28,32 58.25,32 arc45 58.97,32.3 60.03,33.36 arc45 60.33,34.08 60.33,37.08 arc90 59.31,38.1 59.05,38.1 58.42,38.1
  Top 1.524: C45.1 v57.27,32.01 arc-90 v57.28,32
  Bottom 0.508: v50.67,18.8 51.29,19.41 arc-45 51.65,19.56 v53.72,19.56 | v105.28,23.75 arc-45 105.17,23.7 XBEE.1 100.77,24.51 arc90 100.26,25.02 87.31,25.02 arc-90 86.8,25.53 86.8,29.02 arc-90 v86.87,29.08 | R21.2 19.18,12.91 arc90 19.68,13.42 v19.68,22.86 | v33.78,7.49 v42.04,7.49 v50.29,7.49 v58.55,7.49 | v60.45,12.95 v60.45,15.24 | v155.96,2.54 155.96,31.7 arc90 155.45,32.21 JP7.1
  Bottom 1.016: v81.15,31.24 80.56,30.65 arc-45 79.84,30.35 v66.67,30.35 58.29,30.35 | v78.23,48.26 78.23,43.05 arc90 79.25,42.04 v83.19,42.04 | 58.29,30.35 arc90 57.28,29.34 57.28,30.35 58.29,30.35 | 58.29,30.35 arc-90 57.28,31.37 v57.28,32 v57.28,23.24
  pour Top (no thermals): 39.93,34.67 41.67,34.67 arc90 42.8,33.54 48.07,33.54 arc-45 48.59,33.32 49.14,32.78 arc45 49.75,32.52 51.9,32.52 arc90 52.06,32.68 53.61,32.68 53.61,31.33 52.06,31.33 arc90 51.71,31.67 49.29,31.67 arc-45 48.83,31.86 48.66,32.04 arc45 48.03,32.3 42.85,32.3 arc90 41.67,31.11 39.93,31.11
3.3V1  (via drill 0.6, 1)
  Top 0.203: PIC2.19 225.63,24.97 arc-45 225.93,25.69 C54.1 | IMU2.13 214.02,33.67 arc45 214.16,33.73 | C24.1 209.73,31.11 arc90 209.93,31.32 209.93,31.95 | IMU2.9 210.44,31.95 arc-90 210.24,31.75 210.13,31.75 | 210.13,31.75 arc90 209.93,31.55 | 209.93,31.95 arc90 210.13,31.75 | IMU2.8 arc90 209.93,32.94 209.93,31.95 | 205.87,34.8 v205.87,34.97 arc-90 206.07,35.17 IMU2.3
  Top 0.254: PIC2.26 222.13,25.27 arc90 221.88,25.53 221.02,25.53 arc-90 220.76,25.78 C51.1 | PIC2.10 229.74,19.16 arc90 230,19.42 230,20.28 arc-90 230.25,20.54 C53.1 | PIC2.57 223.13,11.05 arc90 223.39,10.79 225.17,10.79 arc-90 225.43,10.54 C50.1 | PIC2.38 212.34,19.66 arc90 212.09,19.41 C52.1 | XLED7.CAT XLED5.CAT | C26.1 arc-90 214.16,33.73 | 197.52,40.01 arc-45 R30.2 | R30.2 arc-45 197.45,40.01 | R30.2 arc90 R30.2 | 205.87,32.38 v205.87,34.97
  Top 0.508: v232.41,26.67 C54.1 | v210.95,38.48 arc90 210.76,38.8 210.76,39.74 R29.2 217.3,39.74 arc-90 217.81,39.23 v217.81,34.92 | v208.53,38.48 arc-90 208.66,38.86 R28.2 | 205.87,34.8 205.87,32.38 205.87,29.46 arc90 206.38,28.96 208.48,28.96 | 220,33.61 220.21,33.61 arc90 220.26,33.66 | R66.1 168.55,1.42 arc45 168.91,1.27 174.63,1.27 arc45 174.99,1.42 R67.1 176.8,1.42 arc45 177.16,1.27 182.88,1.27 arc45 183.24,1.42 R68.1 185.06,1.42 arc45 185.41,1.27 191.14,1.27 arc45 191.5,1.42 R69.1 193.44,1.29 arc45 193.8,1.14 v193.93,1.14 | v190.12,11.18 arc45 190.22,11.22 XLED5.CAT | XLED7.CAT 193.53,14.52 arc45 193.68,14.88 193.68,18.8 | XLED6.CAT 193.53,26.12 arc-45 193.68,25.76 v193.68,23.5 193.68,18.8 | 209.24,28.96 arc45 209.55,29.08 arc-45 209.86,29.21 211.46,29.21 | 208.91,28.96 208.48,28.96 | 208.91,28.96 209.24,28.96 | 208.99,29.72 208.99,29.46 arc-90 208.48,28.96 | 208.99,29.72 arc90 209.5,29.21 209.55,29.21 | 209.55,29.21 212.45,29.21 | 208.99,29.72 C24.1 arc-90 C24.1 | 208.91,28.96 arc-90 209.42,28.45 209.42,27.94 | 209.42,27.94 209.42,27.3 | 209.24,28.96 209.3,28.96 arc90 209.55,29.21 | 209.68,27.94 209.42,27.94 | C55.1 203.12,19.27 arc45 202.76,19.12 v201.93,18.29 194.18,18.29 | 194.18,18.29 arc90 193.68,17.78 | 194.18,18.29 arc-90 193.68,18.8 | v200.66,40.01 199.35,40.01 arc90 C70.1 arc90 198.92,40.01 197.52,40.01 | U$3.8 197.47,40.01 arc90 R30.2 | v197.49,34.92 R32.2 | C68.1 v186.37,27.94 XBEE1.1
  Top 0.762: C53.1 C32.1 arc90 234.31,21.17 v234.31,22.1 | C57.1 C50.1
  Top 1.016: SW1.6 SW1.1 arc45 220.26,42.07 220.26,36.04 | 220.26,34.01 220.26,35.94 | 221.27,35.03 arc90 220.26,34.01 | v231.52,31.77 231.52,34.01 arc90 230.5,35.03 221.27,35.03 | 221.27,35.03 arc-90 220.26,36.04 | R61.2 233.47,12.06 arc45 232.75,11.77 v232.03,11.05 230.38,9.4 arc-45 229.66,9.11 C57.1 | C52.1 C55.1 209.55,21.03 arc-45 v209.68,21.34 | 220.26,34.01 220.26,33.91 | C51.1 C56.1 220.76,30.78 arc45 220.47,31.5 C58.1 arc45 220.26,31.85 220.26,33.66 220.26,33.91 | 220.26,36.04 220.26,35.94 | 220.26,35.94 arc-90 219.24,34.92 | 210.69,28.96 210.48,28.96 | C26.1 216.96,34.08 arc90 v217.81,34.92 219.24,34.92 | 220.26,33.91 arc90 219.24,34.92 | v209.68,25.4 209.68,27.94 arc-90 210.69,28.96 | v215.01,28.96 210.69,28.96
  Bottom 0.254: v205.87,34.97 arc-90 205.82,34.92
  Bottom 0.508: 233.55,26.67 arc90 234.06,27.18 arc90 234.31,27.43 234.31,30.76 | 233.55,26.67 v232.41,26.67 | 233.55,26.67 arc-90 234.06,26.16 | v210.95,38.48 v208.53,38.48 | v190.12,11.18 193.78,7.51 arc-45 193.93,7.16 v193.93,1.14 | 205.82,34.92 201.17,34.92 | 201.17,34.92 arc-90 200.66,35.43 | 200.66,35.43 v200.66,40.01 | 200.66,35.43 arc-90 200.15,34.92 | 201.17,34.92 v197.49,34.92 | v186.37,27.94 190.67,23.64 arc45 191.03,23.5 v193.68,23.5
  Bottom 1.016: 234.31,19.43 arc90 235.33,18.41 | 235.33,18.41 arc90 234.31,17.4 | 234.31,19.43 234.31,13.81 arc-45 234.02,13.09 arc-45 233.98,13 v232.03,11.05 | 234.31,19.43 v234.31,22.1 234.31,30.76 arc90 233.3,31.77 v231.52,31.77 | 235.33,18.41 PROG_1.2 | v217.81,34.92 217.81,29.97 arc-90 216.79,28.96 v215.01,28.96 | USER.1 202.23,16.77 arc-45 201.93,17.49 v201.93,18.29 | v209.68,25.4 v209.68,21.34
3HO
  pour Top (no thermals): 134.11,31.75 136.27,31.75 arc-90 136.53,31.5 136.53,28.19 135.81,28.19 135.81,30.44 arc90 135.56,30.7 134.11,30.7
3HS1  (via drill 0.6)
  Top 0.508: MD1.15 115.11,43.18 arc-45 115.47,43.03 115.8,42.69 arc45 116.16,42.55 120.48,42.55 arc-90 120.99,42.04 C17.1 124.33,41.27 arc-90 124.84,40.77 124.84,35.77 arc-45 124.69,35.41 v124.33,35.05
  Bottom 0.508: v124.33,35.05 133.39,35.05 arc-45 133.75,34.9 134.98,33.68 arc-45 135.13,33.32 135.13,31.61 arc90 D9.C | 135.13,32.89 arc90 135.64,32.38 136.27,32.38
  pour Bottom (no thermals): 149.73,47.62 arc-90 151.51,45.85 arc-90 149.73,44.07 arc-90 147.96,45.85 arc-90
  pour Top (no thermals): 149.73,47.62 arc-90 151.51,45.85 arc-90 149.73,44.07 arc-90 147.96,45.85 arc-90
  pour Bottom: 143.89,35.08 143.89,35.41 arc-45 145.38,39 151.1,44.73 148.62,47.22 145.55,44.15 arc-45 143.81,43.43 142.95,43.43 142.95,35.08
  pour Top: 143.89,34.44 143.89,35.41 arc-45 145.38,39 151.1,44.73 148.62,47.22 145.55,44.15 arc-45 143.81,43.43 142.95,43.43 142.95,34.44
  pour Top (no thermals): 132.97,35.81 132.97,37.47 arc-90 133.6,38.1 136.02,38.1 arc90 137.29,39.37 137.29,40.77 137.29,42.16 arc-90 138.56,43.43 141.86,43.43 143.89,43.43 143.89,35.69 143.89,35.05 arc-90 142.62,33.78 139.57,33.78 134.24,33.78 arc-90 132.97,35.05
  pour Bottom (no thermals): 132.97,21.84 141.35,21.84 arc90 143.89,24.38 143.89,35.31 143.89,43.43 142.88,43.43 141.22,43.43 arc90 140.34,42.55 140.34,40.64 arc-90 138.43,38.73 arc90 137.29,37.59 137.29,34.8 137.29,33.53 arc-90 136.27,32.51 135,32.51 135,31.11 135,28.45 arc-90 134.24,27.69 129.92,27.69 129.92,23.88 129.92,21.84
3LO
  pour Bottom (no thermals): 123.44,24.38 127.41,24.38 arc-90 128.22,23.6 128.22,21.74 123.44,21.74
5V1  (via drill 0.6)
  Top 0.508: C9.1 arc90 104.27,69.81 P3.4 | DI1.16 97.44,54.98 arc-90 C59.1 | C41.1 arc-90 18.63,28.7 DI2.8 v23.11,28.7 | v73.79,69.98 96.74,69.98 arc-45 97.1,69.83 101.32,65.61 arc-45 101.47,65.25 arc-90 101.67,65.44 | 101.67,65.44 arc-45 101.34,65.62 | 101.67,65.44 arc-90 101.73,65.39 101.73,65.2
  Top 1.016: 101.73,64.19 arc-90 102.74,65.2 | 101.73,64.19 101.73,62.02 arc-45 101.43,61.3 98,57.87 arc45 97.7,57.15 C59.1 | 104.31,65.24 arc-90 P3.4 101.73,65.2 101.73,64.19
  Bottom 0.508: v73.79,69.98 50.93,69.98 arc90 50.42,69.47 50.42,63.46 arc-45 50.27,63.1 46.76,59.59 arc-45 46.4,59.44 27.9,59.44 arc45 27.54,59.29 23.26,55.01 arc45 23.11,54.65 v23.11,28.7
5V2  (via drill 0.6, 1.1)
  Top 0.508: 45.72,37.08 arc-90 46.23,36.58 46.23,34.92 | 45.72,37.08 arc90 46.23,37.59 46.23,37.47 | C60.1 90.08,42.38 arc90 v90.17,42.55 | v90.3,51.44 DI1.1 | R9.2 v150.5,8.26 150.5,8.03 arc90 151,7.53 J5.5 | R7.2 149.99,12.83 arc-90 150.5,12.32 v150.5,12.19 150.5,12.06 arc-90 149.99,11.56 R8.2 | DI2.3 28.36,31.24 arc-90 C40.1 | DI2.1 28.07,28.7 arc90 28.57,29.21 C40.1 | 45.72,37.08 30.86,37.08 arc90 30.35,36.58 30.35,31.54 | 5.71,21.23 arc-90 5.21,21.73 | 5.21,20.72 5.21,26.04 arc-90 5.71,26.54 29.84,26.54 arc90 30.35,27.05 30.35,30.52 | 5.71,21.23 J2.2 | 5.21,20.72 arc-90 5.71,21.23 | R25.1 5.71,12.95 arc-90 5.21,13.46 5.21,20.72 | 30.35,30.52 30.35,31.54 | 30.35,31.54 arc-90 29.84,31.03 | 29.84,31.03 C40.1 | 30.35,30.52 arc90 29.84,31.03
  Top 0.762: v150.75,20.7 arc-90 150.66,20.79 R24.1
  Top 1.016: v83.06,36.07 85.81,36.07 arc45 86.53,36.37 87.97,37.8 arc-45 88.69,38.1 90.64,38.1 | 90.64,38.1 arc-45 91.36,37.8 | 91.36,37.8 90.38,38.78 arc-45 90.08,39.5 C60.1 90.08,39.12 arc-90 89.07,38.1 | 90.64,38.1 arc-45 91.36,37.8 | v140.84,14.35 114.17,14.35 arc-90 113.16,15.37 113.16,29.34 arc90 112.14,30.35 99.23,30.35 arc-45 98.51,30.65 91.36,37.8
  Top 1.524: C44.1 54.99,37.09 arc-45 56.07,36.64 57.81,34.9 arc-45 v58.17,34.04
  Bottom 0.508: 90.17,51.44 arc90 v90.3,51.44 arc-90 90.17,51.44 | 90.17,51.44 v90.17,42.55 arc45 90.04,42.24 | v150.5,8.26 v150.5,12.19 148.34,12.19 arc-90 147.83,12.7 v147.83,14.99
  Bottom 0.762: v147.83,14.99 147.83,18.44 arc-45 147.9,18.62 149.84,20.55 arc-45 150.2,20.7 v150.75,20.7
  Bottom 1.016: v83.06,36.07 80.64,36.07 arc90 79.63,35.05 79.63,32.89 arc-90 78.61,31.88 60.75,31.88 arc-45 60.03,32.17 v58.17,34.04 | v140.84,14.35 146.77,14.35 arc45 147.49,14.65 v147.83,14.99
  pour Top (no thermals): 51.92,37.76 arc45 51.74,37.68 50.72,36.54 arc-45 50.29,36.33 48.77,36.33 arc-90 48.01,36.97 48.01,36.87 47.31,36.87 47.31,34.54 48.01,34.54 arc-90 48.95,35.48 50.82,35.48 arc45 51.38,35.94 51.53,36.08 arc-45 51.96,36.41 53.56,36.41
  pour Top (no thermals): 47.37,34.54 46.1,34.54 46.1,41.27 arc-90 46.74,41.91 49.02,41.91 arc-90 49.66,41.27 49.66,39.37 arc-90 49.02,38.73 48.64,38.73 arc90 48.01,38.1 48.01,35.18 arc-90
5V3  (1 unrouted)
  Top 0.254: J17.3 234.31,44.02 | 235.99,44.61 arc-90 235.94,44.66 235.94,44.7
  Top 0.508: R70.1 236.64,43.51 arc90 236.13,44.02 234.31,44.02 234.26,44.02 | 235.99,47.04 235.99,44.61 arc45 236.19,44.17 236.5,43.87
  Top 0.61: J17.3 235.33,44.09 arc90 235.94,44.7 235.94,52.95
  Top 0.635: 235.94,52.95 235.94,54.87 arc90 235.43,55.38 C46.1
  Top 1.016: 221.15,53.55 222.04,53.55 arc45 222.76,53.85 222.88,53.98 arc-45 223.4,54.19 C48.+ 226.31,55.08 arc-45 227.03,55.38 C46.1 | 220.04,54.27 220.93,53.81 arc-45 P5.3 | 220.12,55.02 220.9,55.02 arc-45 221.87,54.74 222.12,54.49 arc45 222.84,54.19 225.03,54.19
  Top 1.118: P5.3 arc90 221.15,53.55
  Top 2.54: P4.7 204.05,44.45 arc45 205.85,45.19 208.81,48.15 arc45 209.55,49.95 209.55,53.98 arc-90 212.09,56.52 216.12,56.52 arc-45 217.91,55.77 218.24,55.01 arc45 220.04,54.27
  Bottom 0.508: J18.3 181.74,40.37 arc90 182.25,40.88 182.25,45.85 arc-90 182.75,46.35 194.1,46.35 arc-45 194.46,46.21 P4.7
15V  (via drill 0.6)
  Top 0.508: R16.1 101.9,47.84 arc45 101.54,47.69 v100.46,46.61 | C30.1 C29.1 109.56,35.27 | 109.56,35.27 arc45 v109.6,35.18 arc-45 109.56,35.27
  Top 0.533: C30.1 109.56,49.02 arc-90 110.07,49.53 MD1.20
  Top 1.016: P3.5 110.6,66.9 arc-90 C10.1
  Bottom 0.508: v109.6,35.18 109.35,34.92
  other vias: 116.2,45.09 116.2,38.73 116.2,62.23
  pour Top (no thermals): 115.75,62.23 arc-90 116.2,62.69 117.09,62.69 arc90 117.36,62.92 118.29,62.92 118.29,61.54 117.36,61.54 arc90 117.09,61.77 116.18,61.77 arc-90 115.75,62.2
  pour Bottom (no thermals): 107.21,66.04 107.21,67.77 116.2,67.77 arc-90 116.71,67.26 116.71,35.94 114.43,35.94 114.43,65.53 arc90 113.92,66.04
  pour Bottom (no thermals): 99.95,46.61 arc-90 100.46,47.12 arc-90 100.97,46.61 100.97,37.99 arc45 101.34,37.09 102.12,36.31 arc45 103.02,35.94 113.28,35.94 arc90 114.43,37.08 114.43,36.7 116.71,36.7 116.71,34.8 arc-90 116.2,34.29 102.13,34.29 arc-45 101.23,34.66 100.32,35.57 arc-45 99.95,36.47
  pour Top (no thermals): 115.75,38.73 arc-90 116.2,39.19 117.09,39.19 arc90 117.36,39.42 118.29,39.42 118.29,38.05 117.36,38.05 arc90 117.09,38.28 116.18,38.28 arc-90 115.75,38.71
  pour Top (no thermals): 115.75,45.09 arc-90 116.2,45.54 117.09,45.54 arc90 117.36,45.77 118.29,45.77 118.29,44.4 117.36,44.4 arc90 117.09,44.63 116.18,44.63 arc-90 115.75,45.06
24V  (via drill 0.9)
  Top 0.508: 95.23,56.62 arc-90 95.12,56.73 95.12,56.96
  Top 0.762: J14.2 13.9,35.29 arc45 14.44,35.51 D8.C 15.37,38.61 arc-90 16.13,39.37 25.91,39.37 arc90 26.67,40.13
  Top 1.016: C39.1 P3.1 arc90 P3.1 103.19,60.1 arc45 102.47,59.8 v99.82,57.15 | 95.3,56.96 95.12,56.96 91.5,56.96 91.65,56.81 arc45 92.37,56.52 92.58,56.52 | v95.76,57.15 95.23,56.62 arc45 94.93,55.9 94.93,53.59 | 26.67,65.28 arc90 25.65,66.29 23.62,66.29 | 26.67,40.13 26.67,65.28 | 26.67,65.28 arc-90 27.69,66.29 29.34,66.29
  Top 1.905: 62.36,71.94 62.29,71.94 arc90 60.39,70.04 | 60.39,70.04 60.39,69.91 arc90 62.29,68.01 76.07,68.01 arc-90 77.98,66.1 77.98,58.42 arc90 79.88,56.52 92.58,56.52 arc-90 94.49,54.61 94.49,39.02 arc45 95.05,37.67 99.77,32.94 arc45 101.12,32.38 113.92,32.38 arc-90 115.82,30.48 115.82,18.29 arc90 117.73,16.38 141.96,16.38 arc45 143.31,16.94 145.49,19.13 arc45 146.05,20.47 146.05,34.56 arc-90 147.96,36.47 J7.2 JP3.1 | 60.39,70.04 arc90 58.48,71.94 57.47,71.94
  Bottom 1.016: v95.76,57.15 v99.82,57.15
  pour Top (no thermals): 26.83,76.2 60.58,76.2 arc-90 63.12,73.66 63.12,71.12 50.8,71.12 arc90 48.9,69.22 48.9,63.37 arc-90 47.88,62.36 42.55,62.36 arc-90 40.51,64.39 arc90 38.99,65.91 25.69,65.91 arc45 23.89,65.17 20.3,61.58 arc-45 18.51,60.83 12.57,60.83 arc-90 10.03,63.37 arc-90 12.57,65.91 14.44,65.91 arc45 16.87,67.29 25.04,75.46 arc-45
24V1
  Top 0.254: J21.1 234.31,72.23 arc-45 234.33,72.26
  Top 1.016: P6.1 210.99,69.3 arc45 211.71,69 C8.1 214.25,68.11 arc45 214.97,67.81 C66.1
  Top 1.27: 234.33,72.26 arc90 233.32,73.27 D7.C 222.63,73.27 arc90 221.36,72 221.36,71.75 arc-45 220.91,70.67 218.5,68.26 arc-45 217.43,67.81 C66.1
  Top 1.524: P6.1 209.55,69.49 arc90 208.28,68.22 208.28,67.87 arc-90 207.01,66.6 195.66,66.6 | 198.83,66.6 arc-90 197.56,67.87 197.56,69.98
  pour Bottom (no thermals): 170.81,74.3 arc-90 172.09,75.56 196.85,75.56 arc-90 198.12,74.3 198.12,67.31 arc-90 196.85,66.04 194.94,66.04 arc-90 193.68,67.31 193.68,70.87 arc90 192.41,72.14 172.09,72.14 arc-90 170.81,73.41
  pour Top (no thermals): 170.81,74.3 arc-90 172.09,75.56 196.85,75.56 arc-90 198.12,74.3 198.12,67.31 arc-90 196.85,66.04 194.94,66.04 arc-90 193.68,67.31 193.68,70.87 arc90 192.41,72.14 172.09,72.14 arc-90 170.81,73.41
AHB
  Top 0.508: C18.2 122.69,50.59 arc-45 123.05,50.44 124.69,48.79 arc-45 124.84,48.43 124.84,45.59 arc-90 124.33,45.09 D2.C 122.29,43.81 arc-90 121.78,43.31 116.67,43.31 arc-45 116.31,43.46 115.47,44.3 arc45 115.11,44.45 MD1.16
AHO  (via drill 0.6)
  Top 0.508: MD1.17 115.11,45.72 arc45 115.47,45.87 116.31,46.71 arc-45 116.67,46.86 v123.57,46.86 | R38.1 133.28,46.35 arc-45 v132.97,46.48
  Bottom 0.508: v132.97,46.48 124.16,46.48 arc-45 123.8,46.63 v123.57,46.86
ALO  (via drill 0.6)
  Top 0.508: v123.57,36.58 123.21,36.94 arc45 122.85,37.08 v113.41,37.08 | v111.89,50.8 MD1.21
  Bottom 0.508: v123.57,36.58 123.57,37.72 arc-45 123.72,38.08 R36.1 | v111.89,50.8 111.89,37.59 arc90 112.39,37.08 v113.41,37.08
BHB  (via drill 0.6)
  Top 0.254: C19.1 arc90 122.29,60.15 D3.C
  Top 0.508: v110.43,54.55 arc45 110.34,54.61 MD1.1 | C19.1 115.57,59.91 arc90 115.06,59.4 115.06,56.77 arc-90 114.55,56.26 v113.47,56.26
  Bottom 0.508: v113.47,56.26 112.8,56.26 arc45 112.44,56.11 v110.43,54.55
BHO  (via drill 0.6)
  Top 0.508: R34.1 133.1,64.14 arc-90 v132.97,64.26 | MD1.24 112.39,54.61 arc-90 111.89,55.12 111.89,56.3 arc-45 112.04,56.66 113.9,58.52 arc45 114.05,58.88 114.05,63.75 arc-90 114.55,64.26 v123.57,64.26
  Bottom 0.508: v123.57,64.26 v132.97,64.26
BLO  (via drill 0.6)
  Top 0.508: MD1.22 116.59,52.07 arc90 117.09,52.58 117.09,53.85 arc-90 117.6,54.36 v123.44,54.36
  Bottom 0.508: v123.44,54.36 123.44,55.59 arc-90 R35.1
BUTTON  (via drill 0.6)
  Top 0.254: v43.43,19.68 43.43,11.46 arc-90 43.18,11.2 v13.87,11.2 | v43.56,22.48 48.54,22.48 arc45 48.72,22.55 49.2,23.04 arc45 49.28,23.22 49.28,26.04 arc-90 49.53,26.29 59.69,26.29 arc90 59.94,26.54 59.94,29.23 arc-45 60.02,29.41 62.92,32.31 arc45 62.99,32.49 62.99,38.12 arc-45 63.07,38.3 63.22,38.45 arc-45 63.4,38.52 PIC1.30
  Bottom 0.254: v13.87,11.2 11.82,11.2 arc-90 R21.1 8.26,11.21 arc90 BUTTON.1 | v43.56,22.48 43.56,20.04 arc-45 43.49,19.74 v43.43,19.68
CHB
  Top 0.508: D1.C 120.99,38.73 arc-45 120.63,38.88 119.44,40.07 arc-45 119.29,40.43 C17.2 117.3,41.27 arc45 116.94,41.13 116.61,40.79 arc-45 116.25,40.64 MD1.13
CHO
  Top 0.508: MD1.14 112.78,41.91 arc90 112.27,41.4 112.27,36.07 arc90 112.78,35.56 121.54,35.56 arc-90 122.05,35.05 122.05,29.08 arc90 122.56,28.57 R39.1
CLO  (via drill 0.6)
  Top 0.508: MD1.19 111.76,48.26 arc90 111.25,47.75 111.25,35.05 arc90 111.76,34.54 120.52,34.54 arc-90 121.03,34.04 121.03,22.35 arc-90 v120.9,22.23
  Bottom 0.508: v120.9,22.23 R37.1
CTS  (via drill 0.6)
  Top 0.254: XBEE.12 102.29,19.22 arc45 102.36,19.39 102.36,25.4 arc90 101.73,26.04 80.5,26.04 arc-45 80.32,26.11 77.16,29.26 arc-45 77.09,29.44 v77.09,34.16 | PIC1.54 74.67,40.02 arc45 74.5,39.95 v73.91,39.37
  Bottom 0.254: v77.09,34.16 74.17,34.16 arc-90 73.91,34.42 v73.91,39.37
FAULT
  Top 0.254: CS2.13 64.26,60.58 arc90 64.52,60.33 66.13,60.33 arc-90 66.38,60.07 C4.1 | C4.1 R3.1 | C4.1 arc90 66.23,58.9 PIC1.16
GND1  (via drill 0.6, 0.9)  (1 unrouted)
  Top 0.508: MD1.10 102.79,43.18 arc45 102.43,43.03 C16.1 | 97.28,42.55 DI1.9 98.04,42.55 arc-90 98.55,42.04 v98.55,41.4 | C9.2 arc-90 106.17,69.68 106.17,64.52 arc90 107.19,63.5 P3.3 | C30.2 C29.2 106.81,36.83 arc-90 106.3,37.34 v106.3,38.1 | C59.2 v101.09,55.24 | C41.2 arc90 18.63,29.97 DI2.7 22.23,29.97 arc90 22.73,30.48 22.73,31.92 arc45 22.58,32.28 22.5,32.36 | 21.59,32.51 arc90 22.1,33.02 v22.1,35.05 22.1,32.98 arc45 22.25,32.62 22.5,32.36 | DI2.5 22.14,32.51 arc-45 22.5,32.36
  Top 0.533: 107.86,42.67 107.86,43.69 | MD1.6 107.35,48.26 arc-90 107.86,47.75 107.86,43.69 | 107.86,43.69 arc-90 107.35,43.18 | 107.35,43.18 MD1.10 | 107.86,42.67 arc90 107.35,43.18 | C30.2 107.86,42.67
  Top 0.762: M1.S 21.75,35.2 arc-45 v22.1,35.05
  Top 1.016: 109.6,63.5 arc90 110.62,64.52 | 109.6,63.5 arc-90 110.62,62.48 C39.2 C10.2 | P3.3 109.6,63.5
  Bottom 0.508: v101.09,55.24 101.73,55.24 | 98.55,47.75 arc90 98.04,48.26 97.92,48.26 | v98.55,41.4 98.55,47.75 | 98.55,47.75 arc-90 99.06,48.26 99.69,48.26
  Bottom 0.762: v22.1,35.05 22.1,61.09 arc-90 22.86,61.85 34.92,61.85 | 29.34,61.85 arc90 30.1,62.61 30.1,64.77
  Bottom 1.905: 72.39,71.94 76.07,71.94 arc-90 77.98,70.04 | 77.98,70.04 77.98,58.42 arc90 79.88,56.52 92.58,56.52 arc-90 94.49,54.61 94.49,39.02 arc45 95.05,37.67 99.77,32.94 arc45 101.12,32.38 113.92,32.38 arc-90 115.82,30.48 115.82,18.29 arc90 117.73,16.38 141.96,16.38 arc45 143.31,16.94 145.49,19.13 arc45 146.05,20.47 146.05,36.56 arc-90 147.96,38.47 J7.1 JP3.2 | 77.98,70.04 arc-90 79.88,71.94 80.96,71.94
  other vias: 117.98,69.02 121.86,69.02 119.82,67.63
  pour Bottom (no thermals): 117.47,26.54 117.47,69.98 122.43,69.98 122.43,26.54
  pour Bottom (no thermals): 122.43,48.01 122.43,46.23 arc90 123.06,45.59 128.14,45.59 arc-90 128.52,45.21 128.52,43.56 arc-90 127.89,42.93 123.06,42.93 arc90 122.43,42.29 122.43,42.16 121.54,42.16 121.54,48.01
  pour Bottom (no thermals): 122.43,30.23 122.43,28.45 arc90 123.06,27.81 128.14,27.81 arc-90 128.52,27.43 128.52,25.78 arc-90 127.89,25.15 118.62,25.15 arc-90 117.47,26.29 117.47,30.23
  pour Bottom (no thermals): 122.43,65.79 122.43,64.01 arc90 123.06,63.37 128.14,63.37 arc-90 128.52,62.99 128.52,61.34 arc-90 127.89,60.71 123.06,60.71 arc90 122.43,60.07 122.43,59.94 121.54,59.94 121.54,65.66
  pour Bottom: 81.41,68.83 105.54,68.83 arc-90 106.17,68.2 106.17,65.79 arc90 106.81,65.15 111.25,65.15 arc-90 111.89,64.52 111.89,59.32 arc-45 111.7,58.87 109.53,56.7 arc45 109.35,56.25 109.35,38.1 arc-90 108.71,37.47 102.62,37.47 arc-90 101.98,38.1 101.98,46.86 arc90 100.71,48.13 97.92,48.13 arc-90 97.28,48.77 97.28,57.66 arc90 96.65,58.29 81.41,58.29
  pour Bottom (no thermals): 13.84,71.75 arc90 11.3,69.22 arc90 13.84,66.67 27.94,66.67 arc-90 29.84,64.77 29.84,63.5 arc90 31.75,61.59 38.1,61.59 arc90 40.64,64.14 40.64,68.58 arc-90 43.18,71.12 115.06,71.12 arc-90 117.47,68.71 122.43,68.71 122.43,71.12 arc90 117.35,76.2 21.37,76.2 arc45 19.58,75.46 16.62,72.5 arc-45 15.46,71.75
  pour Bottom: 81.41,65.53 81.41,69.85 arc90 80.14,71.12 75.82,71.12 75.82,71.63 86.49,71.63 86.49,71.12 arc90 85.22,69.85 arc90 86.23,68.83 86.61,68.83 86.61,65.53
  pour Top (no thermals): 122.17,69.72 109.16,69.72 arc90 108.9,69.47 108.9,68.64 arc90 109.16,68.39 109.22,68.38 116.71,68.38 arc-90 116.97,68.12 116.97,67.12 arc90 117.22,66.87 122.17,66.87 arc90 122.43,67.12 122.43,69.47 arc90
GND2  (via drill 0.6, 0.9, 1.2)
  Top 0.203: IMU1.11 54.22,13.01 arc45 54.28,12.87 C21.1 | C23.2 58.13,17.79 arc-45 58.07,17.64 C22.2 57.24,16.81 arc-45 57.09,16.75 56.46,16.75 | IMU1.15 56.06,15.75 arc90 56.26,15.96 56.26,16.55 | IMU1.18 56.06,17.25 arc-90 56.26,17.05 56.26,16.55 | 56.06,16.75 arc90 56.26,16.95 arc90 56.46,16.75 | IMU1.17 56.06,16.75 | 56.06,16.75 arc-90 56.26,16.55 | 56.26,16.55 arc-90 56.46,16.75 | IMU1.1 49.93,17.25 arc-90 v49.91,17.27
  Top 0.254: PIC1.9 69.73,48.16 arc-45 69.8,48.34 70.75,49.29 arc45 70.83,49.47 C35.2 | PIC1.20 61.42,43.52 arc-90 C38.2 arc-90 61.17,43.69 v59.69,43.69 | C4.2 64.34,58.71 arc45 64.26,58.53 v64.26,57.4 | C23.2 v59.44,18.92 | C21.1 v57.02,11.56 | C20.2 50.08,13.49 arc45 v50.04,13.72 | PIC1.41 70.23,34.55 arc45 70.3,34.37 70.46,34.27 arc-55 70.89,33.4 70.89,32.38 C34.2 | J10.1 12.76,9.03 arc-90 v12.83,8.97 | PIC1.25 63.18,41.02 arc-45 63,41.1 C36.2 | J5.4 152.84,8.53 arc-90 v152.83,8.59
  Top 0.508: 91.99,42.49 arc-90 DI1.8 arc90 91.78,42.28 C60.2 91.78,39.2 arc-90 v91.95,39.12 | XLED4.CAT 105.77,20.66 arc45 v105.66,20.7 | v72.52,51.44 C11.2 C35.2 | J5.4 156.72,8.53 | R42.1 arc90 86.23,31.03 v86.23,32.26 | DI2.4 28.36,32.51 arc90 C40.2 28.7,32.73 v28.7,34.8 | J2.4 21.3,25.23 arc-45 21.66,25.08 23.6,23.14 arc45 23.96,22.99 30.86,22.99 arc90 31.37,23.5 31.37,34.29 arc-90 31.88,34.8 v32.38,34.8 v37.47,34.8 | 156.97,20.95 156.97,21.96 | v153.67,13.34 156.82,16.49 arc45 156.97,16.85 156.97,20.95 | 156.97,21.96 arc-90 156.46,21.45 | 156.46,21.45 J11.1 | 156.97,20.95 arc90 156.46,21.45 | 156.97,25.7 arc-90 JP8.4 JP7.4 | 156.97,25.7 arc90 156.46,26.21 | 156.97,21.96 156.97,25.7
  Top 0.61: v57.78,61.09 58.15,60.85 arc-45 58.33,60.41 C2.2 arc45 58.36,59.62 58.55,59.44 58.55,59.09 arc45 58.73,58.66 C3.2 | CS2.9 59.18,63.95 arc90 58.57,64.56 C5.2 | CS2.16 68.07,63.5 arc45 67.89,63.93 v66.93,64.9 | R2.2 72.67,62.45 arc-90 73.28,61.84 v73.28,61.59
  Top 0.762: C6.2 86.47,20.32 arc-45 85.93,20.54 XBEE.10 | C33.2 C36.2 | 57.53,42.68 57.5,42.7 | 57.5,42.7 arc45 57.6,42.29 | 57.5,42.7 C14.2 arc90 57.15,43.05 56.77,43.05 arc-90 56.01,42.29 | v55.37,63.12 C1.2 C5.2 | C37.2 81.37,40.37 arc-90 81.62,40.12 | C34.2 C13.2 70.45,26.64 arc45 70.67,26.11 PROG.3 | C12.2 C37.2 | C37.2 83.17,40.37 arc90 v83.19,40.39 | C15.- arc90 81.66,38.9 C37.2 | 58.21,42.29 arc45 58.42,42.38 arc-90 58.33,42.29 v54.86,42.29
  Top 1.016: C33.2 58.42,42.38 58.25,42.38 arc-45 57.53,42.68